# Altium PCB IG-2.PCBDOC (part 1 of 3)
Units mm, origin at the board's own origin, x right, y up, seen from the top; angles counter-clockwise.
Board outline 46.6 x 24.5 mm, 4 copper layers (Top, GND Plane, Mid1-Ver, Bottom), stack 1.565 mm thick; 34 components, 46 nets, 339 pads, 275 vias.
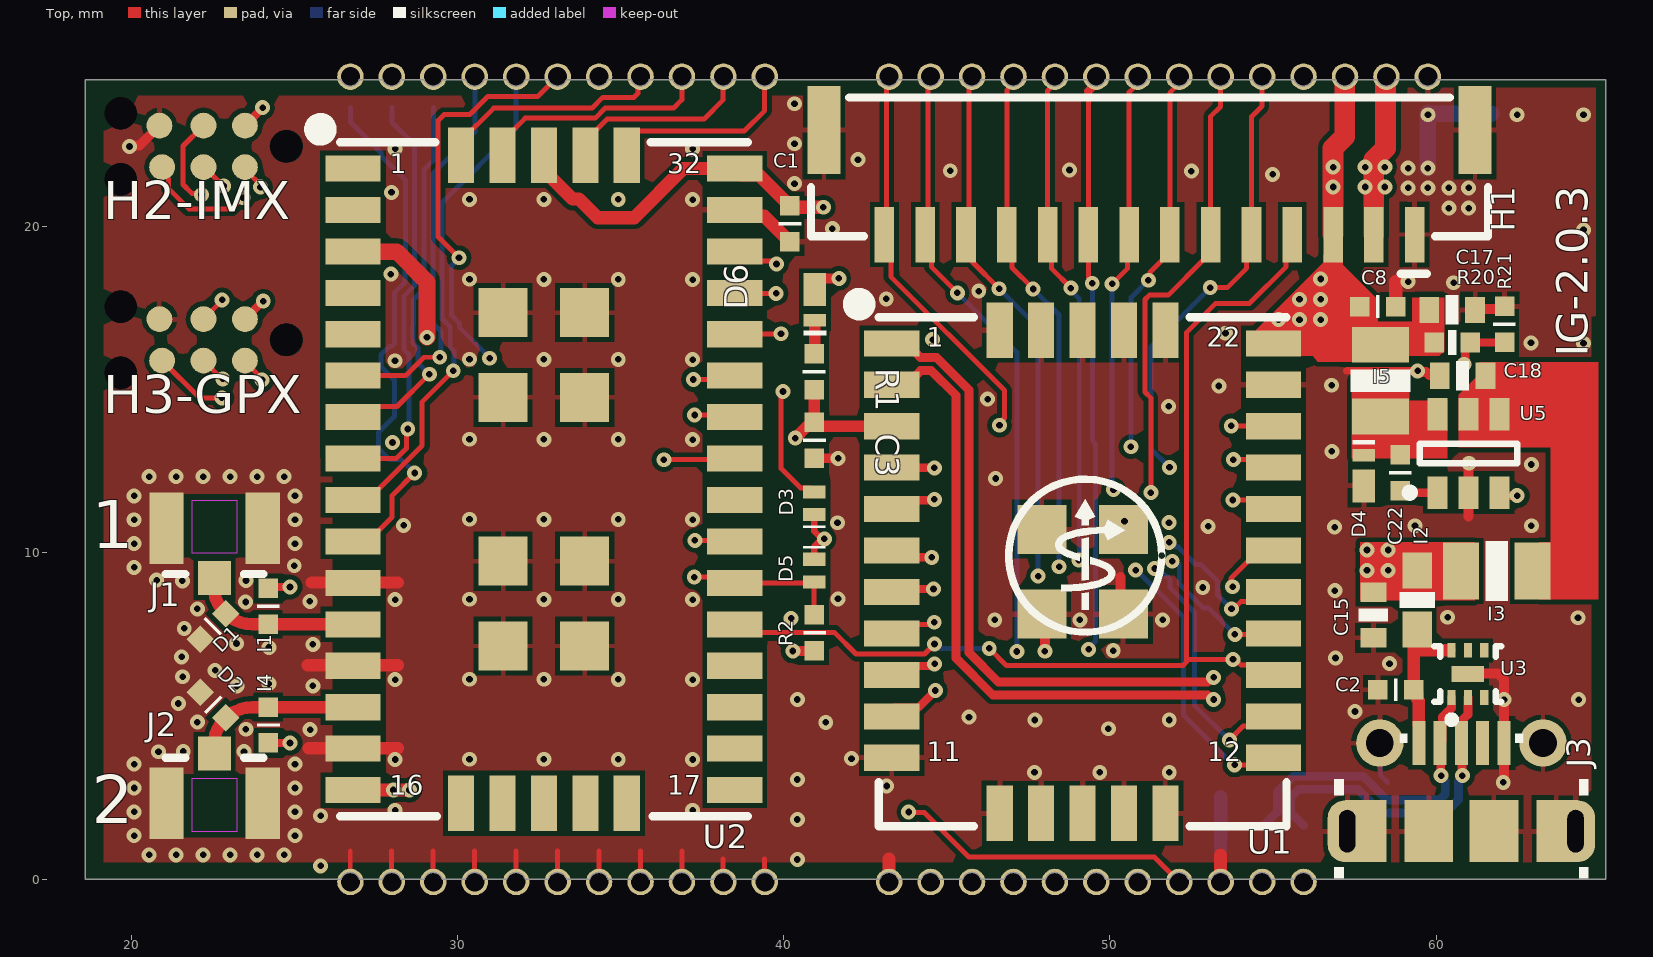
[diagram p0: Top view]
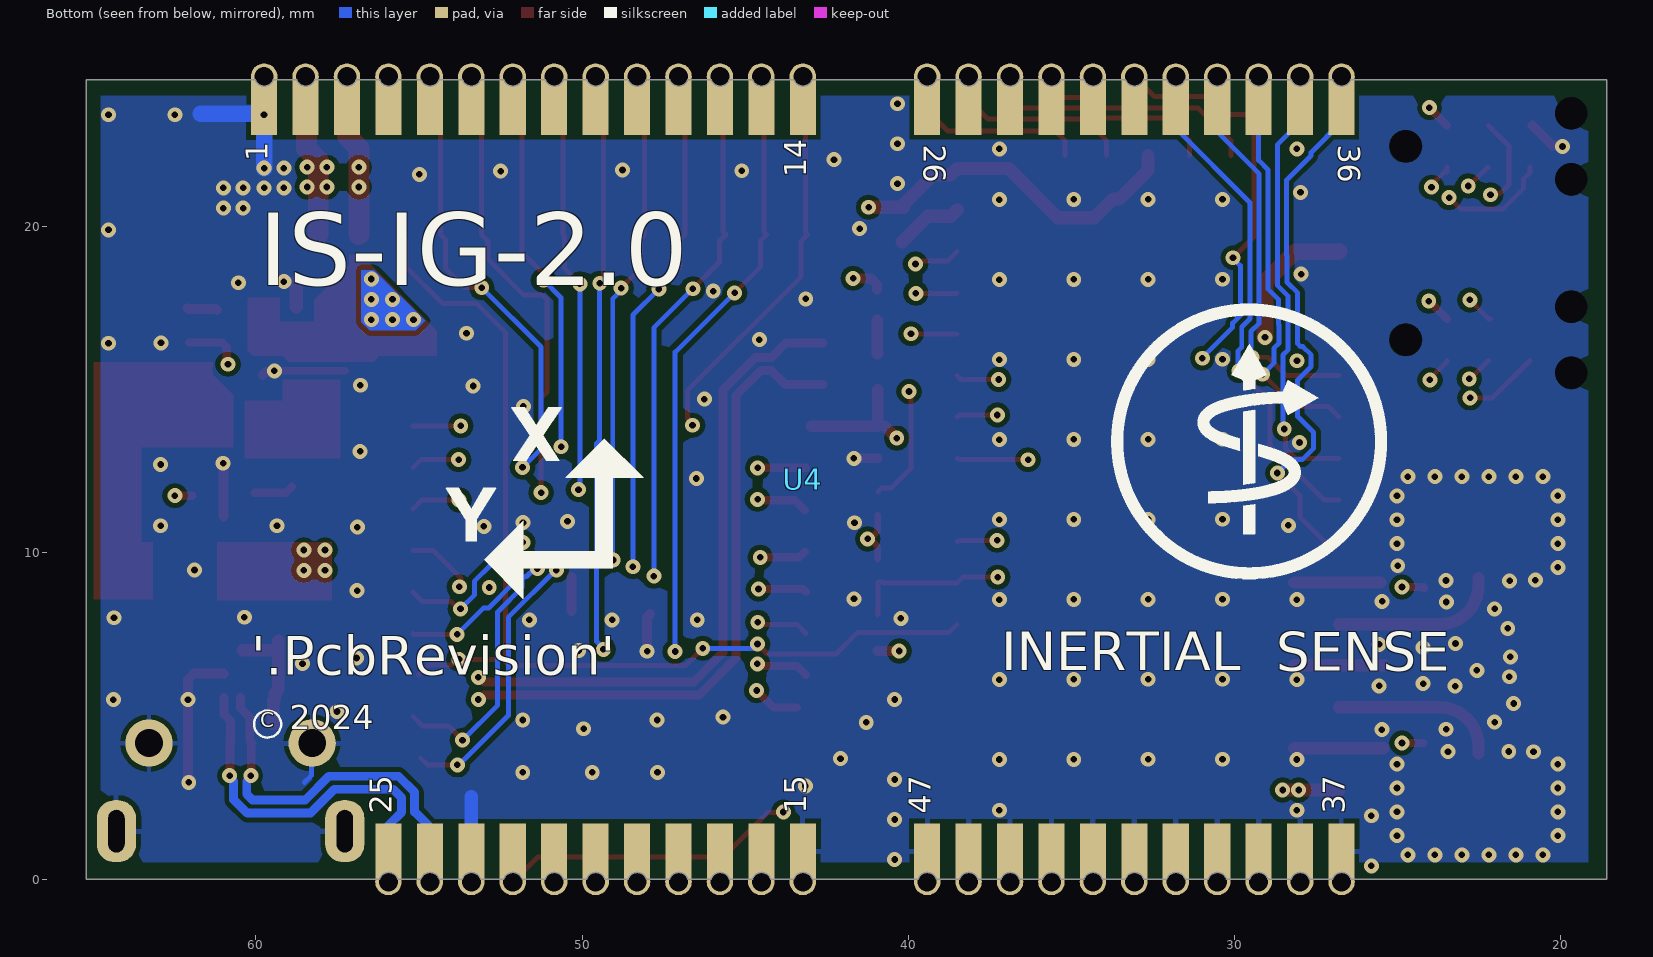
[diagram p1: Bottom view, seen from below]
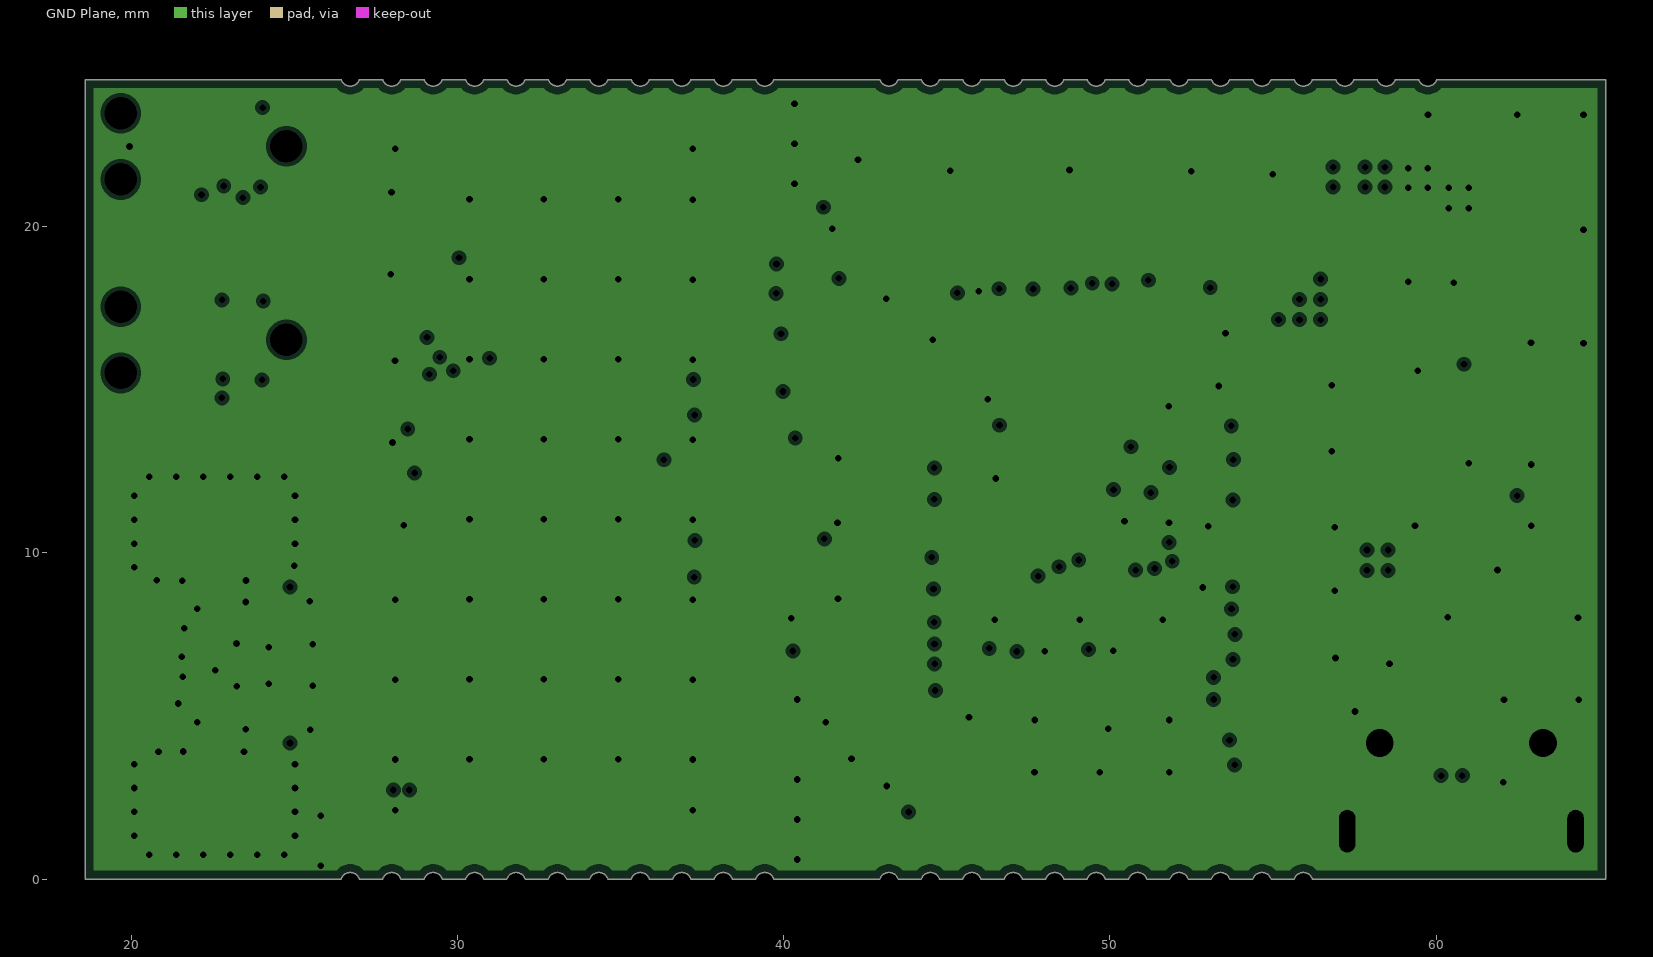
[diagram p2: GND Plane, clearances drawn from the general rule]
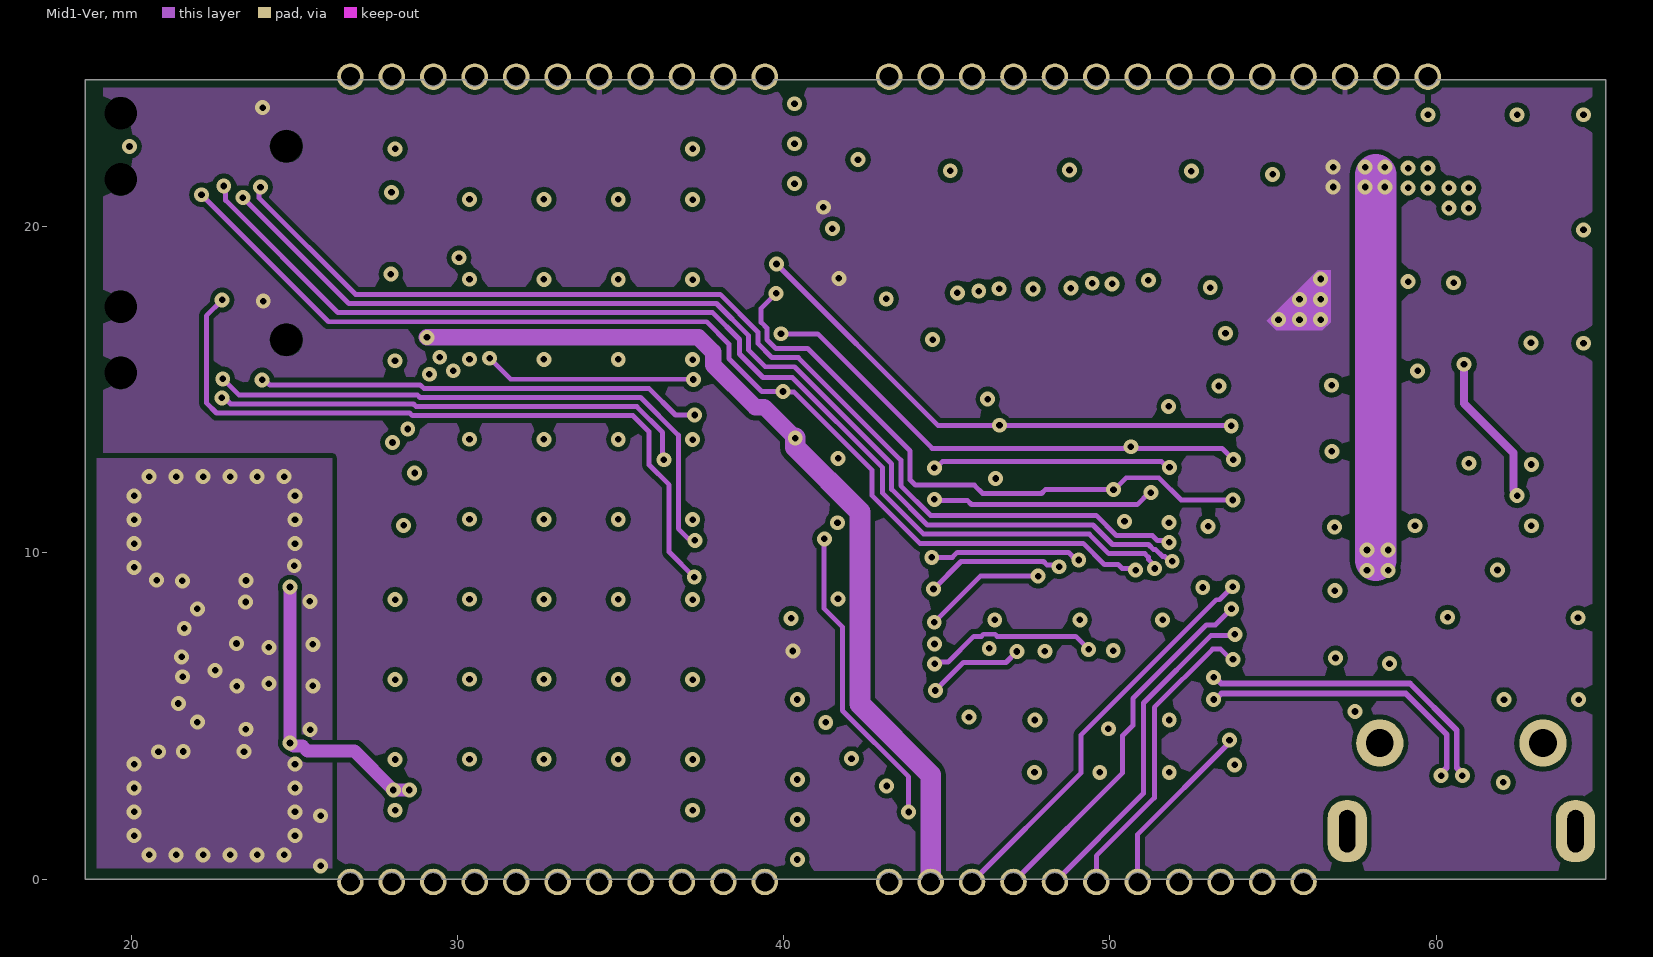
[diagram p3: Mid1-Ver]
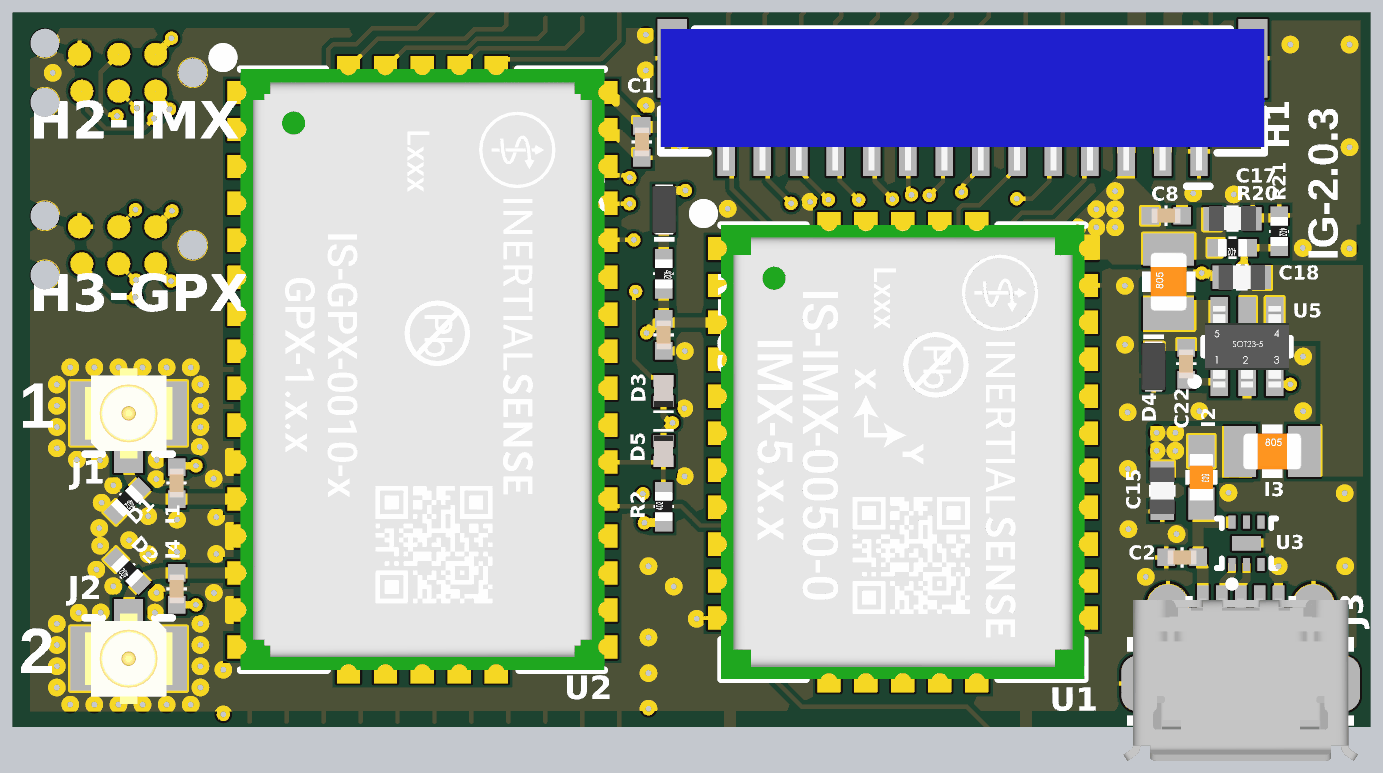
[diagram p5: 3D render of the assembled board from above, using the file's embedded part models]

## Layer stack, top to bottom
Solder Mask Top: solder mask 0.0102, Solder Resist, Dk 3.5
Top: signal copper 0.0533
Dielectric1: prepreg 0.2032, PP-006, Dk 4.1
GND Plane: plane copper 0.0178, net GND
Dielectric3: core 1.016, Core-009, Dk 4.5
Mid1-Ver: signal copper 0.0178
Dielectric2: prepreg 0.2032, PP-006, Dk 4.1
Bottom: signal copper 0.0533
Solder Mask Bottom: solder mask 0.0102, Solder Resist, Dk 3.5

## Board outline
28.265,0 28.979,0 cw(c29.257,-0.09) 29.535,0 30.249,0 cw(c30.527,-0.09) 30.805,0 31.519,0 cw(c31.797,-0.09) 32.075,0 32.789,0 cw(c33.067,-0.09) 33.345,0 34.059,0 cw(c34.337,-0.09) 34.615,0 35.329,0 cw(c35.607,-0.09) 35.885,0 36.599,0 cw(c36.877,-0.09) 37.155,0 37.869,0 cw(c38.147,-0.09) 38.425,0 39.139,0 cw(c39.417,-0.09) 39.695,0 42.949,0 cw(c43.227,-0.09) 43.505,0 44.219,0 cw(c44.497,-0.09) 44.775,0 45.489,0 cw(c45.767,-0.09) 46.045,0 46.759,0 cw(c47.037,-0.09) 47.315,0 48.029,0 cw(c48.307,-0.09) 48.585,0 49.299,0 cw(c49.577,-0.09) 49.855,0 50.569,0 cw(c50.847,-0.09) 51.125,0 51.839,0 cw(c52.117,-0.09) 52.395,0 53.109,0 cw(c53.387,-0.09) 53.665,0 54.379,0 cw(c54.657,-0.09) 54.935,0 55.649,0 cw(c55.927,-0.09) 56.205,0 65.2,0 65.2,24.5 65.194,24.5 60.015,24.5 cw(c59.737,24.59) 59.459,24.5 58.745,24.5 cw(c58.467,24.59) 58.189,24.5 57.475,24.5 cw(c57.197,24.59) 56.919,24.5 56.205,24.5 cw(c55.927,24.59) 55.649,24.5 54.935,24.5 cw(c54.657,24.59) 54.379,24.5 53.665,24.5 cw(c53.387,24.59) 53.109,24.5 52.395,24.5 cw(c52.117,24.59) 51.839,24.5 51.125,24.5 cw(c50.847,24.59) 50.569,24.5 49.855,24.5 cw(c49.577,24.59) 49.299,24.5 48.585,24.5 cw(c48.307,24.59) 48.029,24.5 47.315,24.5 cw(c47.037,24.59) 46.759,24.5 46.045,24.5 cw(c45.767,24.59) 45.489,24.5 44.775,24.5 cw(c44.497,24.59) 44.219,24.5 43.505,24.5 cw(c43.227,24.59) 42.949,24.5 39.695,24.5 cw(c39.417,24.59) 39.139,24.5 38.425,24.5 cw(c38.147,24.59) 37.869,24.5 37.155,24.5 cw(c36.877,24.59) 36.599,24.5 35.885,24.5 cw(c35.607,24.59) 35.329,24.5 34.615,24.5 cw(c34.337,24.59) 34.059,24.5 33.345,24.5 cw(c33.067,24.59) 32.789,24.5 32.075,24.5 cw(c31.797,24.59) 31.519,24.5 30.805,24.5 cw(c30.527,24.59) 30.249,24.5 29.535,24.5 cw(c29.257,24.59) 28.979,24.5 28.265,24.5 cw(c27.987,24.59) 27.709,24.5 26.995,24.5 cw(c26.717,24.59) 26.439,24.5 18.6,24.5 18.6,0 26.439,0 cw(c26.717,-0.09) 26.995,0 27.709,0 cw(c27.987,-0.09)

## Design rules (kind name [scope] priority, off if disabled: settings)
AssemblyTestPointUsage [All] p1 off:
AssemblyTestpoint [All] p1 off: testpointundercomponent=TRUE minsize=1.016 maxsize=2.54 preferedsize=1.524 minholesize=0 maxholesize=1.016 preferedholesize=0.813 testpointgrid=0.025 usegrid=TRUE gridtolerance=0 allowsidetop=TRUE allowsidebottom=TRUE
BoardOutlineClearance BoardOutlineClearance_1 [OnLayer('Silkscreen Top')] p1: gap=0 ignorepadtopadclearanceinfootprint=FALSE
BoardOutlineClearance [All] p2 off: gap=0.25 ignorepadtopadclearanceinfootprint=FALSE
Clearance "Stitching GND" [IsStitchingVia and InNet('GND') vs (IsVia and (Not IsStitchingVia)) Or IsPad] p1: gap=0.05 ignorepadtopadclearanceinfootprint=FALSE
Clearance "Clearance - GPS Ant" [All vs InNet('GPS1_ANT')] p2: gap=0.203 ignorepadtopadclearanceinfootprint=FALSE except(0: Arc-Hole Track-Hole SMDPad-Hole THPad-Hole Via-Hole Fill-Hole Poly-Hole Region-Hole Text-Hole)
Clearance [All] p3: gap=0.127 ignorepadtopadclearanceinfootprint=FALSE except(0: Arc-Hole Track-Hole SMDPad-Hole THPad-Hole Via-Hole Fill-Hole Poly-Hole Region-Hole Text-Hole; 0.15: Arc-Fill Arc-Poly Arc-Region Track-Fill Track-Poly Track-Region SMDPad-Fill SMDPad-Poly SMDPad-Region THPad-Fill THPad-Poly THPad-Region Via-Fill Via-Poly Via-Region Fill-Fill Fill-Poly Fill-Region Poly-Poly Poly-Region Region-Region)
ComponentClearance Ignore [InComponent('H7')] p1: gap=-12.7 collisioncheckmode=3 verticalgap=-12.7 showdistances=FALSE
ComponentClearance HeaderClearance [InComponent('H1')] p2: gap=0.254 collisioncheckmode=3 verticalgap=-0.254 showdistances=FALSE
ComponentClearance Default [All] p3: gap=0.254 collisioncheckmode=3 verticalgap=0.254 showdistances=FALSE
DiffPairsRouting USB [InDifferentialPairClass('USB')] p1: maxlimit=0.127 minlimit=0.127 mostfreqgap=0.127 toplayer_minwidth=0.272 toplayer_maxwidth=0.274 toplayer_prefwidth=0.273 midlayer1_minwidth=0.175 midlayer1_maxwidth=0.178 midlayer1_prefwidth=0.177 bottomlayer_minwidth=0.272 bottomlayer_maxwidth=0.274 bottomlayer_prefwidth=0.273 impedanceprofiledriven=TRUE impedanceprofileid={BBA8E3E2-537E-421E-AE39-E3884618F825} impedanceprofilevalue=90.000000 maxuncoupledlength=12.7
DiffPairsRouting [All] p2: maxlimit=0.203 minlimit=0.203 mostfreqgap=0.203 toplayer_minwidth=0.203 toplayer_maxwidth=0.381 toplayer_prefwidth=0.381 midlayer1_minwidth=0.203 midlayer1_maxwidth=0.381 midlayer1_prefwidth=0.381 bottomlayer_minwidth=0.203 bottomlayer_maxwidth=0.381 bottomlayer_prefwidth=0.381 maxuncoupledlength=12.7
FabricationTestPointUsage [All] p1 off: valid=0 allowmultiple=FALSE
FabricationTestpoint [All] p1 off: side=3 testpointundercomponent=TRUE minsize=1.016 maxsize=2.54 preferedsize=1.524 minholesize=0 maxholesize=1.016 preferedholesize=0.813 testpointgrid=0.025 allowsidetop=TRUE allowsidebottom=TRUE usegrid=TRUE gridtolerance=0
HoleSize [All] p1: absolutevalues=TRUE maxlimit=5.08 minlimit=0.203 maxpercent=80.000 minpercent=20.000
HoleToHoleClearance [All] p1: gap=0.229 allowstackedmicrovias=TRUE
MinimumAnnularRing [All] p1: minimumring=0.114
MinimumSolderMaskSliver [All] p1: minsoldermaskwidth=0.076
PlaneClearance [All] p1: clearance=0.127
PlaneConnect "Power Plane Connect Style" [All] p1: planeconnectstyle=Direct reliefexpansion=0.508 reliefentries=4 reliefconductorwidth=0.178 reliefairgap=0.254
PolygonConnect "No Thermal Polygon Connect" [All vs InNamedPolygon('+1.8_L-01_P-002') or InNamedPolygon('GND_L01_P044') or InPolygonClass('NO THERMALS')] p1: connectstyle=Direct reliefconductorwidth=0.254 reliefentries=4 polygonreliefangle="90 Angle" airgapwidth=0.254
PolygonConnect "Default Polygon Connect" [All] p2: thpad.connectstyle=Relief thpad.reliefconductorwidth=0.15 thpad.reliefentries=4 thpad.polygonreliefangle="90 Angle" thpad.airgapwidth=0.15 smdpad.connectstyle=Relief smdpad.reliefconductorwidth=0.15 smdpad.reliefentries=4 smdpad.polygonreliefangle="90 Angle" smdpad.airgapwidth=0.15 via.connectstyle=Direct via.reliefconductorwidth=0.254 via.reliefentries=4 via.polygonreliefangle="90 Angle" via.airgapwidth=0.254
RoutingCorners "Routing Corners Default" [All] p1: cornerstyle=45-Degree minsetback=2.54 maxsetback=2.54
RoutingLayers "Routing Layers Default" [All] p1: top layer_v5=TRUE mid layer 1_v5=TRUE bottom layer_v5=TRUE
RoutingPriority "Routing Priority Default" [All] p1: routingpriority=0
RoutingVias "Via Style Default" [All] p1: holewidth=0.203 width=0.457 viastyle="Through Hole" minholewidth=0.203 minwidth=0.457 maxholewidth=0.203 maxwidth=0.457
SilkToBoardRegionClearance [All] p1 off:
SilkToSilkClearance [Not ( ((ObjectKind = 'Text') And ((UseInvertedRectangle = 'True') OR (IsTextInverted = 'True'))) OR (ObjectKind = 'Fill') ) vs Not ( ((ObjectKind = 'Text') And ((UseInvertedRectangle = 'True') OR (IsTextInverted = 'True'))) OR (ObjectKind = 'Fill') )] p1: silktosilkclearance=0.025
SilkToSolderMaskClearance SilkscreenOverComponentPads [NOT(IsPad AND OnLayer('Multi-Layer'))] p1: minsilkscreentomaskgap=0 clearancetoexposedcopper=TRUE
SolderMaskExpansion SolderMaskExpansion_Via [IsVia] p1: expansion=-0.5 istentingtop=FALSE
SolderMaskExpansion "Solder Mask Expansion" [All] p2: expansion=0.076 istentingtop=FALSE
SupplyNets "Schematic Supply Nets_3" [InNet('VIN')] p1: voltage=0.000
SupplyNets "Schematic Supply Nets_2" [InNet('GND')] p2: voltage=0.000
SupplyNets "Schematic Supply Nets_1" [InNet('+3.3V')] p3: voltage=0.000
SupplyNets "Schematic Supply Nets" [InNet('VBAT')] p4: voltage=0.000
Width "RF GPS" [InNetClass('RF_GPS')] p1: maxlimit=0.38 minlimit=0.378 preferedwidth=0.378
Width "Width Default" [All] p2: maxlimit=3.81 minlimit=0.076 preferedwidth=0.152
13 further rules are at their usual default settings.

## Classes and differential pairs
differential pair class USB: USB.D
net class RF_GPS: GNSS1_ANT GNSS2_ANT
polygon class "NO THERMALS": RF_GND_L-01_P-001 RF_GND_L-03_P-001
differential pair USB.D: +USB.D_P -USB.D_N

## Components (designator, comment, footprint, x,y, rotation, side; value= is the part's Value field where it differs from the comment)
C1 "Cap" 0402 40.19,20.08 r270 top value=0.1uF
C2 "Cap" 0402 58.757,5.799 r180 top value=100nF
C3 "Cap" 0402 40.942,13.446 r270 top value=2.2uF
C8 "Cap" 0402 58.205,17.541 r0 top value=0.1uF
C15 "Cap" 0603 58.073,8.092 r270 top value=2.2uF
C17 "Cap" 0603 60.488,17.442 r0 top value=22uF
C18 "Cap" 0603 60.809,15.425 r180 top value=2.2uF
C22 "Cap" 0402 58.898,12.452 r90 top value=0.1uF
D1 "Diode - Bidirectional Zener" R0402 22.51,7.74 r225 top
D2 "Diode - Bidirectional Zener" R0402 22.51,5.337 r135 top
D3 "Diode - Schottky" D0402 40.935,11.515 r90 top
D4 "Diode - Schottky" D0603B 57.776,12.359 r270 top
D5 "Diode - Schottky" D0402 40.935,9.45 r270 top
D6 "Diode - Schottky" D0603B 40.958,17.755 r90 top
H1 "Hdr - 14pin - mount" SM14B-GHS-TB(LF)(SN) 51.212,24.301 r180 top locked
H2-IMX "TC2030-IDC" TC2030-IDC-NL 24.76,22.455 r180 top
H3-GPX "TC2030-IDC" TC2030-IDC-NL 24.76,16.525 r180 top
I1 "Inductor" 0402 24.204,8.356 r270 top value=120nH
I2 "Inductor" I0603 59.418,8.552 r270 top value="220 Ohm @ 100MHz"
I3 "Inductor" 0806 61.854,9.441 r0 top value=2.2uH
I4 "Inductor" 0402 24.209,4.72 r90 top value=120nH
I5 "Inductor" 0806 58.296,15.273 r90 top value=2.2uH
J1 "RF - GND x 2" "RF UMC SMD" 22.558,10.75 r270 top locked
J2 "RF - GND x 2" "RF UMC SMD" 22.558,2.321 r90 top locked
J3 "USB-TYPEAB-4GND" "USB Micro AB R/A THR" 60.77,1.467 r0 top locked
R1 "Res" R0402 40.942,15.546 r270 top value=1K
R2 "Res" R0402 40.942,7.547 r90 top value=10K
R20 "Res" R0402 60.488,16.442 r180 top value=30.9K
R21 "Res" R0402 62.094,17.003 r270 top value=10K
U1 "IMX" IS-IMX-5.0 42.911,17.217 r0 top locked
U2 "GPX" IS-GPX-1.0 26.401,22.576 r0 top locked
U3 "VBUS053" QFN50P160X160X60-6N 60.969,6.285 r90 top
U4 "IG 2.0 LGA PADS" IG-2.0_LGA 0,0 r0 top locked
U5 "ADP2301" MO-178-AB 60.988,13.042 r90 top

## Footprints (in the part's own frame and the unit in brackets; to place one, negate y for a bottom-side part, rotate by r counter-clockwise, add the part's x,y. Pads: shape width x height; smd on the part's side, far side on the other; paste and mask are expansions set on the pad)
0402 [mm]
  rect 0.6x0.6 smd: 1(-0.55,0) 2(0.55,0)
  silkscreen extent -0.05,-0.35 0.05,0.35, body extent -0.5,-0.25 0.5,0.25, height 0.51
0603 [mm]
  rect 0.6x0.8 smd: 1(-0.7,0) 2(0.7,0)
  silkscreen extent -0.2,-0.45 0.2,0.45, body extent -0.8,-0.43 0.8,0.43, height 0.87
0806 [mm]
  rect 1.1x1.75 smd: 1(-1.1,0) 2(1.1,0)
  silkscreen extent -0.35,-0.92 0.35,0.92, body extent -1,-0.62 1,0.63, height 0.78
D0402 [mm]
  rect 0.4x0.7 smd: A(0.35,0) C(-0.35,0)
  silkscreen extent -0.76,-0.35 -0.68,0.35, body extent -0.55,-0.33 0.55,0.33, height 0.56
D0603B [mm] "Molded Diode, 2-Leads, Body 1.60x0.80mm, IPC Medium Density"
  rect 1.005x0.69 smd: A(0.312,0)
  rect 0.385x0.69 smd: C(-0.625,0)
  silkscreen extent -1.1,-0.35 -0.95,0.35, body extent -0.86,-0.42 0.86,0.42, height 0.45
I0603 [mm]
  rect 1.1x0.9 smd: 1(-0.9,0) 2(0.9,0)
  silkscreen extent -0.25,-0.55 0.25,0.55, body extent -0.8,-0.4 0.8,0.4, height 0.3
IG-2.0_LGA [mm] "IMX multi-frequency RTK-GNSS Module"
  rect 0.8x1.7 smd far side paste-2.54: 1(59.743,23.65) 2(58.473,23.65) 3(57.203,23.65) 4(55.933,23.65) 5(54.663,23.65) 6(53.393,23.65) 7(52.123,23.65) 8(50.853,23.65) 9(49.583,23.65) 10(48.313,23.65) 11(47.043,23.65) 12(45.773,23.65) 13(44.503,23.65) 14(43.233,23.65) 15(43.233,0.85) 16(44.503,0.85) 17(45.773,0.85) 18(47.043,0.85) 19(48.313,0.85) 20(49.583,0.85) 21(50.853,0.85) 22(52.123,0.85) 23(53.393,0.85) 24(54.663,0.85) 25(55.933,0.85) 26(39.423,23.65) 27(38.153,23.65) 28(36.883,23.65) 29(35.613,23.65) 30(34.343,23.65) 31(33.073,23.65) 32(31.803,23.65) 33(30.533,23.65) 34(29.263,23.65) 35(27.993,23.65) 36(26.723,23.65) 37(26.723,0.85) 38(27.993,0.85) 39(29.263,0.85) 40(30.533,0.85) 41(31.803,0.85) 42(33.073,0.85) 43(34.343,0.85) 44(35.613,0.85) 45(36.883,0.85) 46(38.153,0.85) 47(39.423,0.85)
  rect 0.8x0.4 smd far side paste-2 mask+0.038: 1(59.743,24.25) 2(58.473,24.25) 3(57.203,24.25) 4(55.933,24.25) 5(54.663,24.25) 6(53.393,24.25) 7(52.123,24.25) 8(50.853,24.25) 9(49.583,24.25) 10(48.313,24.25) 11(47.043,24.25) 12(45.773,24.25) 13(44.503,24.25) 14(43.233,24.25) 15(43.233,0.25) 16(44.503,0.25) 17(45.773,0.25) 18(47.043,0.25) 19(48.313,0.25) 20(49.583,0.25) 21(50.853,0.25) 22(52.123,0.25) 23(53.393,0.25) 24(54.663,0.25) 25(55.933,0.25) 26(39.423,24.25) 27(38.153,24.25) 28(36.883,24.25) 29(35.613,24.25) 30(34.343,24.25) 31(33.073,24.25) 32(31.803,24.25) 33(30.533,24.25) 34(29.263,24.25) 35(27.993,24.25) 36(26.723,24.25) 37(26.723,0.25) 38(27.993,0.25) 39(29.263,0.25) 40(30.533,0.25) 41(31.803,0.25) 42(33.073,0.25) 43(34.343,0.25) 44(35.613,0.25) 45(36.883,0.25) 46(38.153,0.25) 47(39.423,0.25)
  round 0.813 hole 0.584 mask-0.051: 1(59.743,24.59) 2(58.473,24.59) 3(57.203,24.59) 4(55.933,24.59) 5(54.663,24.59) 6(53.393,24.59) 7(52.123,24.59) 8(50.853,24.59) 9(49.583,24.59) 10(48.313,24.59) 11(47.043,24.59) 12(45.773,24.59) 13(44.503,24.59) 14(43.233,24.59) 15(43.233,-0.09) 16(44.503,-0.09) 17(45.773,-0.09) 18(47.043,-0.09) 19(48.313,-0.09) 20(49.583,-0.09) 21(50.853,-0.09) 22(52.123,-0.09) 23(53.393,-0.09) 24(54.663,-0.09) 25(55.933,-0.09) 26(39.423,24.59) 27(38.153,24.59) 28(36.883,24.59) 29(35.613,24.59) 30(34.343,24.59) 31(33.073,24.59) 32(31.803,24.59) 33(30.533,24.59) 34(29.263,24.59) 35(27.993,24.59) 36(26.723,24.59) 37(26.723,-0.09) 38(27.993,-0.09) 39(29.263,-0.09) 40(30.533,-0.09) 41(31.803,-0.09) 42(33.073,-0.09) 43(34.343,-0.09) 44(35.613,-0.09) 45(36.883,-0.09) 46(38.153,-0.09) 47(39.423,-0.09)
  body extent 25.33,0.05 60.14,24.45, height 0
IS-GPX-1.0 [mm] "Inerial Sense GPX-1.0, 42pins 1.27mm pitch"
  rect 1.5x1.5 smd: 0(5,-15.435) 0(5,-12.835) 0(5,-7.815) 0(5,-5.215) 0(7.5,-15.435) 0(7.5,-12.835) 0(7.5,-7.815) 0(7.5,-5.215)
  rect 1.7x0.8 smd paste-2.54: 1(0.4,-0.8) 2(0.4,-2.07) 3(0.4,-3.34) 4(0.4,-4.61) 5(0.4,-5.88) 6(0.4,-7.15) 7(0.4,-8.42) 8(0.4,-9.69) 9(0.4,-10.96) 10(0.4,-12.23) 11(0.4,-13.5) 12(0.4,-14.77) 13(0.4,-16.04) 14(0.4,-17.31) 15(0.4,-18.58) 16(0.4,-19.85) 17(12.1,-19.85) 18(12.1,-18.58) 19(12.1,-17.31) 20(12.1,-16.04) 21(12.1,-14.77) 22(12.1,-13.5) 23(12.1,-12.23) 24(12.1,-10.96) 25(12.1,-9.69) 26(12.1,-8.42) 27(12.1,-7.15) 28(12.1,-5.88) 29(12.1,-4.61) 30(12.1,-3.34) 31(12.1,-2.07) 32(12.1,-0.8)
  rect 0.8x1.7 smd paste-2.54: 33(3.71,-20.25) 34(4.98,-20.25) 35(6.25,-20.25) 36(7.52,-20.25) 37(8.79,-20.25) 38(8.79,-0.4) 39(7.52,-0.4) 40(6.25,-0.4) 41(4.98,-0.4) 42(3.71,-0.4)
  silkscreen extent -0.85,-20.65 12.5,0.65, body extent 0,-20.65 12.5,0, height 2.88
IS-IMX-5.0 [mm] "Inerial Sense IMX-5.0, 22pins 1.27mm pitch"
  rect 1.5x1.5 smd: 0(5,-9.1) 0(5,-6.5) 0(7.5,-9.1) 0(7.5,-6.5)
  rect 1.7x0.8 smd paste-2.54: 1(0.4,-0.8) 2(0.4,-2.07) 3(0.4,-3.34) 4(0.4,-4.61) 5(0.4,-5.88) 6(0.4,-7.15) 7(0.4,-8.42) 8(0.4,-9.69) 9(0.4,-10.96) 10(0.4,-12.23) 11(0.4,-13.5) 12(12.1,-13.5) 13(12.1,-12.23) 14(12.1,-10.96) 15(12.1,-9.69) 16(12.1,-8.42) 17(12.1,-7.15) 18(12.1,-5.88) 19(12.1,-4.61) 20(12.1,-3.34) 21(12.1,-2.07) 22(12.1,-0.8)
  rect 0.8x1.7 smd paste-2.54: 23(3.71,-15.2) 23(4.98,-15.2) 23(6.25,-15.2) 23(7.52,-15.2) 23(8.79,-15.2) 24(3.71,-0.4) 24(4.98,-0.4) 24(6.25,-0.4) 24(7.52,-0.4) 24(8.79,-0.4)
  silkscreen extent -0.85,-15.6 12.5,0.65, body extent 0,-15.6 12.5,0, height 2.89
MO-178-AB [mm] "SOT23, 6-Leads, Body 3.0x2.8mm (max), Pitch 0.95mm, IPC Medium Density"
  rect 1x0.6 smd: 1(-1.2,0.95) 2(-1.2,0) 3(-1.2,-0.95) 4(1.2,-0.95) 5(1.2,0) 6(1.2,0.95)
  silkscreen extent -1.32,-1.5 0.3,1.92, body extent -1.4,-1.45 1.41,1.45, height 1.12
QFN50P160X160X60-6N [mm] "QFN, 6-Leads, Body 1.6x1.6mm (max), Pitch 0.50mm, IPC Medium Density"
  rect 0.45x0.25 smd: 1(-0.725,0.5) 2(-0.725,0) 3(-0.725,-0.5) 4(0.725,-0.5) 5(0.725,0) 6(0.725,0.5)
  rect 0.5x1 smd: 7(0,0)
  silkscreen extent -1.5,-1.02 0.85,1.02, body extent -0.82,-0.82 0.82,0.82, height 0.6
R0402 [mm]
  rect 0.6x0.6 smd: 1(-0.55,0) 2(0.55,0)
  silkscreen extent -0.05,-0.36 0.05,0.34, body extent -0.5,-0.3 0.5,0.3, height 0.2
"RF UMC SMD" [mm] "Ultra Miniature Coaxial Surface Mount"
  rect 1.05x1 smd: 1(1.525,0)
  rect 2.2x1.05 smd: 2(0,-1.475) 3(0,1.475)
  Top pour cut-out: -1.05,0.95 -1.05,-0.95 0.9,-0.95 0.9,0.95
  Top keep-out region: -0.85,0.7 -0.85,-0.7 0.75,-0.7 0.75,0.7
  silkscreen extent 1.4,-1.5 1.4,1.5, body extent -1.55,-1.5 1.55,1.5, height 1.3
SM14B-GHS-TB(LF)(SN) [mm] "CONN HEADER GH TOP 15POS 1.25MM"
  rect 1x2.7 smd: 0(-9.975,1.35) 0(9.975,1.35)
  rect 0.6x1.7 smd: 1(-8.125,4.55) 2(-6.875,4.55) 3(-5.625,4.55) 4(-4.375,4.55) 5(-3.125,4.55) 6(-1.875,4.55) 7(-0.625,4.55) 8(0.625,4.55) 9(1.875,4.55) 10(3.125,4.55) 11(4.375,4.55) 12(5.625,4.55) 13(6.875,4.55) 14(8.125,4.55)
  silkscreen extent -10.38,0.35 10.38,5.75, body extent -10.37,0.35 10.37,5.2, height 4.35
TC2030-IDC-NL [mm] "Tag-Connect 6-Pin with No Legs (PN# TC2030-IDC-NL)"
  round 0.9 hole 0.995 unplated: 0(0,0) 0(5.08,-1.016) 0(5.08,1.016)
  round 0.79 smd paste-0.39: 1(1.27,-0.635) 2(1.27,0.635) 3(2.54,-0.635) 4(2.54,0.635) 5(3.89,-0.635) 6(3.81,0.635)
"USB Micro AB R/A THR" [mm] "USB Micro AB R/A Through Hole"
  rect 0.4x1.35 smd: 1(-1.3,2.7) 2(-0.65,2.7) 3(0,2.7) 4(0.65,2.7) 5(1.3,2.7)
  rrect90% 1.2x1.9 hole 0.5 slot 1.3 at 90 deg paste-2539.97 mask+0.076: 6(-3.5,0)
  rect 1.2x1.9 smd: 6(-2.9,0) 7(2.9,0)
  round 1.45 hole 0.85 mask+0.102: 6(-2.5,2.7) 7(2.5,2.7)
  rrect90% 1.2x1.9 hole 0.5 slot 1.3 at 90 deg mask+0.076: 7(3.5,0)
  rect 1.5x1.9 smd: 8(-1,0) 9(1,0)
  silkscreen extent -3.9,-1.45 3.9,3, body extent -4.02,-2.65 4.03,2.92, height 2.69

## Part data
C1 C2 C8: "CAP CER .10UF 50V X7R 10% 0402", Capacitance=0.1µF, Manufacturer="TDK Corporation", Manufacturer Part Number=C1005X7R1H104K, Operating Temperature="-55°C ~ 125°C", Package / Case="0402 (1005 Metric)", Ratings=-, Supplier Part Number 1=445-5932-1-ND, Temperature Coefficient=X7R, Tolerance=±10%, Voltage - Rated=50V, Applications="General Purpose", Category=Capacitors, ComponentLink1Description=http://www.tdk.co.jp/tefe02/e412_c.pdf, ComponentLink1URL=http://www.tdk.co.jp/tefe02/e412_c.pdf, Features=-, Height=-, LatestRevisionDate=17-Jul-2002, LatestRevisionNote="Re-released for DXP Platform.", Lead Spacing=-, Lead Style=-, Mounting Type="Surface Mount, MLCC", Packaging="Cut Tape (CT)", Pricing 1="1=0.3, 10=0.2, 100=0.08, 250=0.05752, 500=0.041, 1000=0.03 (USD)", Published=8-Jun-2000, Publisher="Altium Limited", RoHS="RoHS Compliant", Size / Dimension="0.039\" L x 0.020\" W (1.00mm x 0.50mm)", Stock 1=174080, Supplier 1=Digi-Key, Thickness="0.022\" (0.55mm)"
C3: "0402 2.2 uF 6.3 V ±10% Tolerance X6S Multilayer Ceramic Capacitor", Case Code (Imperial)=0402, Case Code (Metric)=1005, Manufacturer=Murata, Manufacturer Part Number=GRM155C80J225KE95D, Max Operating Temperature=105°C, Min Operating Temperature=-55°C, Supplier Part Number=490-10012-2-ND, Tolerance=10%, Voltage Rating=6.3V, Case/Package=0402, Category=Capacitors, ComponentLink1Description=http://search.murata.co.jp/Ceramy/image/img/A01X/G101/ENG/GRM155C80J225KE95-01.pdf?src-supplier=Digi-Key, ComponentLink1URL=http://search.murata.co.jp/Ceramy/image/img/A01X/G101/ENG/GRM155C80J225KE95-01.pdf?src-supplier=Digi-Key, ComponentLink2Description=http://search.murata.co.jp/Ceramy/image/img/A01X/partnumbering_e_01.pdf?src-supplier=Digi-Key, ComponentLink2URL=http://search.murata.co.jp/Ceramy/image/img/A01X/partnumbering_e_01.pdf?src-supplier=Digi-Key, Height=0.3mm, LatestRevisionDate=17-Jul-2002, LatestRevisionNote="Re-released for DXP Platform.", Length=0.039inch, Material=Ceramic, Mounting Technology="Surface Mount", Packaging="Cut Tape", Pricing="10000=0.01548, 20000=0.01475, 30000=0.01401, 50000=0.01253, 100000=0.01014, 250000=0.00922 (USD)", Published=8-Jun-2000, Publisher="Altium Limited", RoHS=Yes, RoHS Compliant=Yes, Series=GRM, Stock=7200000, Supplier=Digi-Key, Thickness=0.022inch, Voltage Rating (DC)=6.3V, Width=0.02inch
C15 C18: "CAP CER 2.2UF 25V X6S 0603", Capacitance=2.2uF, Case Code (Imperial)=0603, Case Code (Metric)=1608, Dielectric=X6S, Manufacturer=Murata, Manufacturer Part Number=GRT188C81E225KE13D, Max Operating Temperature=105°C, Min Operating Temperature=-55°C, Supplier Part Number 1=490-12293-6-ND, Tolerance=10%, Voltage Rating=25V, Case/Package=0603, Category=Capacitors, ComponentLink1Description=http://www.farnell.com/datasheets/2165949.pdf, ComponentLink1URL=http://www.farnell.com/datasheets/2165949.pdf, ComponentLink2Description=http://search.murata.co.jp/Ceramy/image/img/A01X/G101/ENG/GRT188C81E225KE13-01.pdf, ComponentLink2URL=http://search.murata.co.jp/Ceramy/image/img/A01X/G101/ENG/GRT188C81E225KE13-01.pdf, LatestRevisionDate=17-Jul-2002, LatestRevisionNote="Re-released for DXP Platform.", Length=0.063inch, Mount="Surface Mount", Packaging="Tape and Reel", Pricing 1="1=0.35, 10=0.239, 100=0.1355, 500=0.09564, 1000=0.08369 (USD)", Published=8-Jun-2000, Publisher="Altium Limited", Stock 1=16854, Supplier 1=Digi-Key, Thickness=0.035inch, Voltage Rating (DC)=25V, Width=0.031inch
C17: "CAP CER 22UF 6.3V X6S 0603", Capacitance=22uF, Case Code (Imperial)=0603, Case Code (Metric)=1608, Dielectric=X6S, Manufacturer=Murata, Manufacturer Part Number=GRM188C80J226ME15D, Max Operating Temperature=105°C, Min Operating Temperature=-55°C, Package Quantity=4000, Supplier Part Number 1=490-10471-6-ND, Tolerance=20%, Voltage Rating=6.3V, Case/Package=0603, Category=Capacitors, ComponentLink1Description=http://www.mouser.com/ds/2/281/c02e-2905.pdf, ComponentLink1URL=http://www.mouser.com/ds/2/281/c02e-2905.pdf, ComponentLink2Description=http://search.murata.co.jp/Ceramy/image/img/A01X/partnumbering_e_01.pdf, ComponentLink2URL=http://search.murata.co.jp/Ceramy/image/img/A01X/partnumbering_e_01.pdf, Height=0.8mm, LatestRevisionDate=17-Jul-2002, LatestRevisionNote="Re-released for DXP Platform.", Lead Free="Lead Free", Length=0.063inch, Mount="Surface Mount", Packaging="Tape and Reel", Pricing 1="1=0.25, 10=0.168, 100=0.0955, 500=0.0674, 1000=0.05897 (USD)", Published=8-Jun-2000, Publisher="Altium Limited", Stock 1=0, Supplier 1=Digi-Key, Termination=SMD/SMT, Thickness=0.039inch, Voltage Rating (DC)=6.3V, Weight=0.000222oz, Width=0.8mm
C22: "CAP CER 0.1UF 50V X7R 0402", Capacitance=0.1uF, Case Code (Imperial)=0402, Case Code (Metric)=1005, Dielectric=X7R, Manufacturer=TDK, Manufacturer Part Number=CGA2B3X7R1H104K050BB, Max Operating Temperature=125°C, Min Operating Temperature=-55°C, Package Quantity=1, Ratings=AEC-Q200, Supplier Part Number 1=445-6899-1-ND, Tolerance=10%, Voltage=50V, Case/Package=0402, Category=Capacitors, ComponentLink1Description=https://datasheet.ciiva.com/16498/mlccspec-automotive-general-midvoltage-en-16498528.pdf?src-supplier=Future+Electronics, ComponentLink1URL=https://datasheet.ciiva.com/16498/mlccspec-automotive-general-midvoltage-en-16498528.pdf?src-supplier=Future+Electronics, ComponentLink2Description=https://datasheet.ciiva.com/24216/cga2b3x7r1h104k050bb-266281-24216070.pdf?src-supplier=Mouser, ComponentLink2URL=https://datasheet.ciiva.com/24216/cga2b3x7r1h104k050bb-266281-24216070.pdf?src-supplier=Mouser, ComponentLink3Description=https://datasheet.ciiva.com/7975/1788388-7975306.pdf?src-supplier=Element14, ComponentLink3URL=https://datasheet.ciiva.com/7975/1788388-7975306.pdf?src-supplier=Element14, ComponentLink4Description=https://datasheet.ciiva.com/22703/1807242-22703013.pdf?src-supplier=Element14, ComponentLink4URL=https://datasheet.ciiva.com/22703/1807242-22703013.pdf?src-supplier=Element14, ComponentLink5Description=https://datasheet.ciiva.com/22725/1735392-22725627.pdf?src-supplier=Element14, ComponentLink5URL=https://datasheet.ciiva.com/22725/1735392-22725627.pdf?src-supplier=Element14, Composition=Ceramic, Depth=0.5mm, Height=0.5mm, LatestRevisionDate=17-Jul-2002, LatestRevisionNote="Re-released for DXP Platform.", Lead Free="Lead Free", Length=1mm, Mount="Surface Mount", Packaging="Tape and Reel", Pricing 1="1=0.16000, 10=0.11700, 100=0.05500, 500=0.03858, 1000=0.03194, 2500=0.02973, 5000=0.02720 (USD)", Published=8-Jun-2000, Publisher="Altium Limited", REACH SVHC="No SVHC", RoHS=Yes, Stock 1=12402793, Supplier 1=Digi-Key, Termination=SMD/SMT, Thickness=0.022inch, Voltage Rating=50V, Voltage Rating (DC)=50V, Weight=2.3E-05oz, Width=0.02inch
D1 D2: "LITTELFUSE - PESD0402-140 - DIODE, ESD PROTECTION, 0402, FULL REEL", Case/Package=0402, Clamping Voltage=40V, Manufacturer=Littelfuse, Manufacturer Part Number=PESD0402-140, Max Operating Temperature=125°C, Min Operating Temperature=-55°C, Operating Supply Voltage=14V, Power Line Protection=No, Resistor Type=Zener, Supplier Part Number 1=PESD0402-140CT-ND, Category="TVS Diodes", ComponentLink1Description=https://datasheet.ciiva.com/58684/-58684341.pdf?src-supplier=Digi-Key, ComponentLink1URL=https://datasheet.ciiva.com/58684/-58684341.pdf?src-supplier=Digi-Key, Direction=Bidirectional, Lead Free="Lead Free", Mount="Surface Mount", Number of Bidirectional Channels=1, Number of Pins=2, Packaging="Tape and Reel", Pricing 1="1=0.40000, 10=0.32100, 100=0.22900, 500=0.17400, 1000=0.13737, 2000=0.13279, 5000=0.12821 (USD)", REACH SVHC=Unknown, Reverse Standoff Voltage=14V, RoHS=No, Stock 1=211482, Supplier 1=Digi-Key, Turn-On Delay Time=1ns, Working Voltage=14V
D3 D5: "CDBQR0130L; SMT Schottky Diode; 35V 100mA; 2-Pin SOD-923F (0402)", Average Rectified Current=100mA, Case Code (Imperial)=0402, Case Code (Metric)=1005, Manufacturer=Comchip, Manufacturer Part Number=CDBQR0130L, Max Reverse Leakage Current=10uA, Max Reverse Voltage (DC)=30V, Max Surge Current=1A, Package Quantity=1, Supplier Part Number=641-1271-2-ND, Case/Package=0402, Category="Rectifier Diodes", Mounting Technology="Surface Mount", Packaging="Tape and Reel", Pricing="5000=0.05980, 10000=0.05083, 25000=0.04784, 50000=0.04485, 125000=0.03887 (USD)", RoHS=Yes, RoHS Compliant=Yes, Stock=645000, Supplier=Digi-Key
  D3: ComponentLink1Description=https://datasheet.ciiva.com/913/cdbqr0130l-revb795355-913009.pdf?src-supplier=Digi-Key, ComponentLink1URL=https://datasheet.ciiva.com/913/cdbqr0130l-revb795355-913009.pdf?src-supplier=Digi-Key, ComponentLink2Description=https://datasheet.ciiva.com/4716/cdbqr0130l-revb795355-33189-4716003.pdf?src-supplier=Mouser, ComponentLink2URL=https://datasheet.ciiva.com/4716/cdbqr0130l-revb795355-33189-4716003.pdf?src-supplier=Mouser, ComponentLink3Description=https://datasheet.ciiva.com/913/cdbqr0130l-revb795355-913010.pdf?src-supplier=Digi-Key, ComponentLink3URL=https://datasheet.ciiva.com/913/cdbqr0130l-revb795355-913010.pdf?src-supplier=Digi-Key, ComponentLink4Description=https://datasheet.ciiva.com/913/cdbqr0130l-revb795355-913011.pdf?src-supplier=Digi-Key, ComponentLink4URL=https://datasheet.ciiva.com/913/cdbqr0130l-revb795355-913011.pdf?src-supplier=Digi-Key
  D5: ComponentLink1Description=https://datasheet.ciiva.com/8301/bas70lp-8301585.pdf?src-supplier=Avnet, ComponentLink1URL=https://datasheet.ciiva.com/8301/bas70lp-8301585.pdf?src-supplier=Avnet, ComponentLink2Description=https://datasheet.ciiva.com/26949/getdatasheetpartid-661958-26949407.pdf?src-supplier=Verical, ComponentLink2URL=https://datasheet.ciiva.com/26949/getdatasheetpartid-661958-26949407.pdf?src-supplier=Verical, ComponentLink3Description=https://datasheet.ciiva.com/18567/bas70lp-18567705.pdf?src-supplier=Digi-Key, ComponentLink3URL=https://datasheet.ciiva.com/18567/bas70lp-18567705.pdf?src-supplier=Digi-Key, ComponentLink4Description=https://datasheet.ciiva.com/16418/bas70lp-16418375.pdf?src-supplier=Future+Electronics, ComponentLink4URL=https://datasheet.ciiva.com/16418/bas70lp-16418375.pdf?src-supplier=Future+Electronics, ComponentLink5Description=https://datasheet.ciiva.com/913/cdbqr0130l-revb795355-913009.pdf?src-supplier=Digi-Key, ComponentLink5URL=https://datasheet.ciiva.com/913/cdbqr0130l-revb795355-913009.pdf?src-supplier=Digi-Key, ComponentLink6Description=https://datasheet.ciiva.com/4716/cdbqr0130l-revb795355-33189-4716003.pdf?src-supplier=Mouser, ComponentLink6URL=https://datasheet.ciiva.com/4716/cdbqr0130l-revb795355-33189-4716003.pdf?src-supplier=Mouser, ComponentLink7Description=https://datasheet.ciiva.com/913/cdbqr0130l-revb795355-913010.pdf?src-supplier=Digi-Key, ComponentLink7URL=https://datasheet.ciiva.com/913/cdbqr0130l-revb795355-913010.pdf?src-supplier=Digi-Key, ComponentLink8Description=https://datasheet.ciiva.com/913/cdbqr0130l-revb795355-913011.pdf?src-supplier=Digi-Key, ComponentLink8URL=https://datasheet.ciiva.com/913/cdbqr0130l-revb795355-913011.pdf?src-supplier=Digi-Key
D4 D6: "DIODE SCHOTTKY 30V 2A 0603", Manufacturer=Vishay, Manufacturer Part Number=VSKY20301608-G4-08, Supplier Part Number 1=VSKY20301608-G4-08GICT-ND, ComponentLink1Description=http://www.mouser.com/ds/2/427/vsky20301608-777242.pdf, ComponentLink1URL=http://www.mouser.com/ds/2/427/vsky20301608-777242.pdf, Pricing 1="1=0.38, 10=0.305, 25=0.2792, 100=0.2076, 250=0.1882, 500=0.15574, 1000=0.1168, 2500=0.10707 (USD)", Stock 1=13064, Supplier 1=Digi-Key
H1: "Conn Shrouded Header HDR 14 POS 1.25mm Solder ST Top Entry SMD T/R", Manufacturer=JST, Manufacturer Part Number=SM14B-GHS-TB(LF)(SN), Supplier Part Number 1=455-1576-2-ND, Category=Connectors, Pricing 1="2500=0.35044, 5000=0.33876, 12500=0.31072, 25000=0.30371 (USD)", RoHS=No, Supplier 1=Digi-Key
H2-IMX H3-GPX: "6 pin header"
I1 I4: "Inductor RF Chip Wirewound 120nH 5% 100MHz 20Q-Factor 110mA 2.66Ohm DCR 0402 Paper T/R", Case Code (Imperial)=0402, Case Code (Metric)=1005, Current Rating=110mA, DC Resistance (DCR)=2.66R, Inductance=120nH, Inductance Tolerance=5%, Manufacturer=Murata, Manufacturer Part Number=LQW15ANR12J00D, Max Operating Temperature=125°C, Min Operating Temperature=-55°C, Package Quantity=10000, Self Resonant Frequency=1GHz, Supplier Part Number 1=490-4091-1-ND, Test Frequency=100MHz, Case/Package=0402, Category="Fixed Inductors", ComponentLink1Description=http://search.murata.co.jp/Ceramy/image/img/PDF/ENG/L0075S0083LQG15HS.pdf, ComponentLink1URL=http://search.murata.co.jp/Ceramy/image/img/PDF/ENG/L0075S0083LQG15HS.pdf, ComponentLink2Description=https://datasheet.ciiva.com/11799/0900766b8090d800-11799096.pdf?src-supplier=RSComponents, ComponentLink2URL=https://datasheet.ciiva.com/11799/0900766b8090d800-11799096.pdf?src-supplier=RSComponents, ComponentLink3Description=https://datasheet.ciiva.com/1042/l0075s0080lqw15a-00-1042180.pdf?src-supplier=Digi-Key, ComponentLink3URL=https://datasheet.ciiva.com/1042/l0075s0080lqw15a-00-1042180.pdf?src-supplier=Digi-Key, ComponentLink4Description=https://datasheet.ciiva.com/1042/l0075s0080lqw15a-00-1042181.pdf?src-supplier=Digi-Key, ComponentLink4URL=https://datasheet.ciiva.com/1042/l0075s0080lqw15a-00-1042181.pdf?src-supplier=Digi-Key, ComponentLink5Description=https://datasheet.ciiva.com/1042/l0075s0080lqw15a-00-1042182.pdf?src-supplier=Digi-Key, ComponentLink5URL=https://datasheet.ciiva.com/1042/l0075s0080lqw15a-00-1042182.pdf?src-supplier=Digi-Key, ComponentLink6Description=https://datasheet.ciiva.com/16207/l0075s0080lqw15a-00-16207819.pdf?src-supplier=Future+Electronics, ComponentLink6URL=https://datasheet.ciiva.com/16207/l0075s0080lqw15a-00-16207819.pdf?src-supplier=Future+Electronics, ComponentLink7Description=https://datasheet.ciiva.com/8506/l0075s0080lqw15a-00-8506030.pdf?src-supplier=Avnet, ComponentLink7URL=https://datasheet.ciiva.com/8506/l0075s0080lqw15a-00-8506030.pdf?src-supplier=Avnet, Core Material=Air,Ferrite, DC Current=110mA, Depth=0.6mm, Height=0.5mm, Lead Free="Lead Free", Length=1mm, Max DC Current=110mA, Military Standard=Not, Mount="Surface Mount", Number of Pins=2, Packaging="Tape and Reel", Pricing 1="1=0.15000, 10=0.13500, 25=0.12000, 50=0.10200, 100=0.09000, 250=0.08252, 500=0.07500, 1000=0.06300, 2500=0.05400 (USD)", Radiation Hardening=No, REACH SVHC="No SVHC", RoHS=Yes, Shielding=Unshielded, Stock 1=2053, Supplier 1=Digi-Key, Termination=SMD/SMT, Tolerance=5%, Weight=2.8E-05oz, Width=0.02inch
I2: "FERRITE CHIP 220 OHM 2500MA 0603", Current Rating=2.5A, DC Resistance (DCR)="40 mOhm Max", Impedance @ Frequency="220 Ohm @ 100MHz", Manufacturer="Murata Electronics North America", Manufacturer Part Number=BLM18SG221TN1D, Package / Case="0603 (1608 Metric)", Supplier Part Number 1=490-5225-1-ND, Category=Filters, ComponentLink1Description=http://search.murata.co.jp/Ceramy/image/img/PDF/ENG/L0110S0100BLM18S.pdf, ComponentLink1URL=http://search.murata.co.jp/Ceramy/image/img/PDF/ENG/L0110S0100BLM18S.pdf, Filter Type="Differential Mode - Single", Height (Max)="0.037\" (0.95mm)", Mounting Type="Surface Mount", Packaging="Cut Tape (CT)", Pricing 1="1=0.14, 10=0.116, 50=0.075, 100=0.0646, 250=0.05172, 500=0.04654, 1000=0.03878, 5000=0.03619 (USD)", RoHS="RoHS Compliant", Size / Dimension="0.063\" L x 0.031\" W (1.60mm x 0.80mm)", Stock 1=146728, Supplier 1=Digi-Key
I3 I5: "FIXED IND 2.2UH 1.2A 110 MOHM", Case Code (Imperial)=0806, Case Code (Metric)=2016, Current Rating=1.2A, DC Resistance (DCR)=137.5mR, Inductance=2.2uh, Manufacturer=TDK, Manufacturer Part Number=MLP2016H2R2MT0S1, Max Operating Temperature=125°C, Min Operating Temperature=-40°C, Package Quantity=3000, Supplier Part Number 1=445-15724-6-ND, Test Frequency=2MHz, Tolerance=20%, Case/Package=0806, ComponentLink1Description=https://datasheet.ciiva.com/29697/inductor-commercial-power-mlp-en-29697725.pdf, ComponentLink1URL=https://datasheet.ciiva.com/29697/inductor-commercial-power-mlp-en-29697725.pdf, ComponentLink2Description=https://datasheet.ciiva.com/29697/inductor-commercial-power-mlp-en-29697726.pdf, ComponentLink2URL=https://datasheet.ciiva.com/29697/inductor-commercial-power-mlp-en-29697726.pdf, Core Material=Ferrite, Height - Seated (Max)=0.039inch, Lead Free="Lead Free", Length=0.079inch, Mount="Surface Mount", Packaging="Tape and Reel", Pricing 1="1=0.38, 10=0.335, 100=0.2302, 500=0.19674, 1000=0.1507 (USD)", Shielding=Unshielded, Stock 1=14048, Supplier 1=Digi-Key, Width=0.063inch
J1 J2: "CONN UMC RCPT STR 50 OHM SMD", Dielectric Material=-, Frequency - Max=6GHz, Housing Color=Gold, Manufacturer="Emerson Network Power Connectivity Johnson", Manufacturer Part Number=128-0711-201, Operating Temperature="-40°C ~ 90°C", Supplier Part Number 1=J983CT-ND, Voltage Rating=200V, Body Finish=Gold, Body Material=-, Cable Group=-, Category="Connectors, Interconnects", Center Contact Material=-, Center Contact Plating=Gold, ComponentLink1Description=http://media.digikey.com/pdf/Data%20Sheets/Emerson%20PDFs/UMC%20Product%20Catalog.pdf, ComponentLink1URL=http://media.digikey.com/pdf/Data%20Sheets/Emerson%20PDFs/UMC%20Product%20Catalog.pdf, Connector Style="Ultra Miniature Coaxial", Connector Type="Receptacle, Male Pins", Contact Termination=Solder, Fastening Type=Snap-On, Features=-, Impedance="50 Ohm", Ingress Protection=-, Mounting Type="Surface Mount", Packaging="Cut Tape (CT)", Pricing 1="1=0.93, 10=0.832, 50=0.784, 100=0.672, 250=0.576, 500=0.544, 750=0.48, 1000=0.448 (USD)", RoHS="RoHS Compliant", Shield Termination=Solder, Stock 1=1514, Supplier 1=Digi-Key
J3: "CONN USB AB 4POS", Colour=Black, Current Rating=1.8A, Flammability Rating="UL94 V-0", Insulation Resistance=1GR, Manufacturer="Amphenol FCI", Manufacturer Part Number=10118194-0001LF, Max Operating Temperature=85°C, Max Voltage Rating (AC)=100V, Min Operating Temperature=-55°C, Package Quantity=9600, Supplier Part Number 1=609-4618-1-ND, ComponentLink1Description=https://datasheet.ciiva.com/851/10118194-851110.pdf, ComponentLink1URL=https://datasheet.ciiva.com/851/10118194-851110.pdf, ComponentLink2Description=https://datasheet.ciiva.com/851/10118194-851111.pdf, ComponentLink2URL=https://datasheet.ciiva.com/851/10118194-851111.pdf, ComponentLink3Description=https://datasheet.ciiva.com/4598/10118194ac-197217-4598807.pdf, ComponentLink3URL=https://datasheet.ciiva.com/4598/10118194ac-197217-4598807.pdf, ComponentLink4Description=https://datasheet.ciiva.com/29907/10118194-29907230.pdf, ComponentLink4URL=https://datasheet.ciiva.com/29907/10118194-29907230.pdf, ComponentLink5Description=https://datasheet.ciiva.com/26945/getdatasheetpartid-418619-26945695.pdf, ComponentLink5URL=https://datasheet.ciiva.com/26945/getdatasheetpartid-418619-26945695.pdf, Connector Type=USB,Receptacle, Contact Material="Copper Alloy", Contact Plating=Gold, Depth=5mm, Features=Shielded, Gender=Receptacle, Housing Material=Polymer, Lead Free="Lead Free", Length=8.05mm, Mount="Surface Mount,Horizontal", Number of Contacts=5, Number of Ports=1, Number of Terminals=5, Orientation="Right Angle", Packaging="Tape and Reel", Pitch=0.65mm, Pricing 1="1=0.48, 10=0.447, 25=0.402, 50=0.3574, 100=0.3424, 250=0.31264, 500=0.29776 (USD)", Radiation Hardening=No, Stock 1=77572, Supplier 1=Digi-Key, Termination=Solder
R1: "1 kOhms ¡À1% 0.063W, 1/16W Chip Resistor 0402 (1005 Metric) Moisture Resistant Thick Film", Case Code (Imperial)=0402, Case Code (Metric)=1005, Manufacturer=Yageo, Manufacturer Part Number=RC0402FR-071KL, Max Operating Temperature=155°C, Max Power Dissipation=63mW, Min Operating Temperature=-55°C, Power Rating=62.5mW, Resistance Tolerance=1%, Resistor Type="Thick Film", Supplier Part Number=311-1.00KLRTR-ND, Temperature Coefficient=100ppm/°C, Voltage Rating=50V, Case/Package=0402, Category="Chip SMD Resistors", ComponentLink1Description=https://datasheet.ciiva.com/11819/0900766b80c66297-11819477.pdf?src-supplier=Rs, ComponentLink1URL=https://datasheet.ciiva.com/11819/0900766b80c66297-11819477.pdf?src-supplier=Rs, ComponentLink2Description=https://datasheet.ciiva.com/7983/1018594-7983502.pdf?src-supplier=Element14, ComponentLink2URL=https://datasheet.ciiva.com/7983/1018594-7983502.pdf?src-supplier=Element14, ComponentLink3Description=https://datasheet.ciiva.com/22747/1018594-22747513.pdf?src-supplier=Element14, ComponentLink3URL=https://datasheet.ciiva.com/22747/1018594-22747513.pdf?src-supplier=Element14, ComponentLink4Description=https://datasheet.ciiva.com/12666/pyu-rc0402-51-rohs-l-6-r-12666741.pdf?src-supplier=Mouser, ComponentLink4URL=https://datasheet.ciiva.com/12666/pyu-rc0402-51-rohs-l-6-r-12666741.pdf?src-supplier=Mouser, ComponentLink5Description=https://datasheet.ciiva.com/7849/1018594-7849869.pdf?src-supplier=Element14, ComponentLink5URL=https://datasheet.ciiva.com/7849/1018594-7849869.pdf?src-supplier=Element14, ComponentLink6Description=https://datasheet.ciiva.com/7849/1018594-7849871.pdf?src-supplier=Element14, ComponentLink6URL=https://datasheet.ciiva.com/7849/1018594-7849871.pdf?src-supplier=Element14, ComponentLink7Description=https://datasheet.ciiva.com/17063/pyu-rc0402-51-rohs-l-6-r-17063193.pdf?src-supplier=Future+Electronics, ComponentLink7URL=https://datasheet.ciiva.com/17063/pyu-rc0402-51-rohs-l-6-r-17063193.pdf?src-supplier=Future+Electronics, Construction=Rectangular, Depth=0.5mm, Features="Moisture Resistant", Height=0.32mm, Lead Free="Lead Free", Length=1mm, Military Standard=Not, Number of Terminations=2, Packaging="Tape and Reel", Pins=2, Pricing="10000=0.00261, 20000=0.00231, 30000=0.00216, 50000=0.00199, 100000=0.00179 (USD)", Reach SVHC Compliant=No, RoHS=Yes, RoHS Compliant=Yes, Series=RC, Stock=29757748, Supplier=Digi-Key, Technology="THICK FILM", Termination=SMD/SMT, Tolerance=1%, Voltage Rating (DC)=50V, Width=0.5mm
R2: "10 kOhms 1% 0.063W, 1/16W Chip Resistor 0402 (1005 Metric) Moisture Resistant Thick Film", Case Code (Imperial)=0402, Case Code (Metric)=1005, Manufacturer="Stackpole Electronics", Manufacturer Part Number=RMCF0402FT10K0, Max Operating Temperature=155°C, Max Power Dissipation=63mW, Min Operating Temperature=-55°C, Power Rating=62.5mW, Resistance Tolerance=1%, Resistor Type="Thick Film", Supplier Part Number=RMCF0402FT10K0TR-ND, Temperature Coefficient=100ppm/°C, Voltage Rating=50V, Case/Package=0402, Category="Chip SMD Resistors", ComponentLink1Description=https://datasheet.ciiva.com/11819/0900766b80c66297-11819477.pdf?src-supplier=Rs, ComponentLink1URL=https://datasheet.ciiva.com/11819/0900766b80c66297-11819477.pdf?src-supplier=Rs, ComponentLink2Description=https://datasheet.ciiva.com/7983/1018594-7983502.pdf?src-supplier=Element14, ComponentLink2URL=https://datasheet.ciiva.com/7983/1018594-7983502.pdf?src-supplier=Element14, ComponentLink3Description=https://datasheet.ciiva.com/22747/1018594-22747513.pdf?src-supplier=Element14, ComponentLink3URL=https://datasheet.ciiva.com/22747/1018594-22747513.pdf?src-supplier=Element14, ComponentLink4Description=https://datasheet.ciiva.com/12666/pyu-rc0402-51-rohs-l-6-r-12666741.pdf?src-supplier=Mouser, ComponentLink4URL=https://datasheet.ciiva.com/12666/pyu-rc0402-51-rohs-l-6-r-12666741.pdf?src-supplier=Mouser, ComponentLink5Description=https://datasheet.ciiva.com/7849/1018594-7849869.pdf?src-supplier=Element14, ComponentLink5URL=https://datasheet.ciiva.com/7849/1018594-7849869.pdf?src-supplier=Element14, ComponentLink6Description=https://datasheet.ciiva.com/7849/1018594-7849871.pdf?src-supplier=Element14, ComponentLink6URL=https://datasheet.ciiva.com/7849/1018594-7849871.pdf?src-supplier=Element14, ComponentLink7Description=https://datasheet.ciiva.com/17063/pyu-rc0402-51-rohs-l-6-r-17063193.pdf?src-supplier=Future+Electronics, ComponentLink7URL=https://datasheet.ciiva.com/17063/pyu-rc0402-51-rohs-l-6-r-17063193.pdf?src-supplier=Future+Electronics, Construction=Rectangular, Depth=0.5mm, Features="Moisture Resistant", Height=0.32mm, Lead Free="Lead Free", Length=1mm, Military Standard=Not, Number of Terminations=2, Packaging="Tape and Reel", Pins=2, Pricing="10000=0.00261, 20000=0.00231, 30000=0.00216, 50000=0.00199, 100000=0.00179 (USD)", Reach SVHC Compliant=No, RoHS=Yes, RoHS Compliant=Yes, Series=RC, Stock=29757748, Supplier=Digi-Key, Technology="THICK FILM", Termination=SMD/SMT, Tolerance=1%, Voltage Rating (DC)=50V, Width=0.5mm
R20: "RES TF 30.9K OHM 1% 1/16W 0402", Manufacturer="Stackpole Electronics Inc", Manufacturer Part Number=RMCF0402FT30K9, Package / Case="0402 (1005 Metric)", Power (Watts)="0.063W, 1/16W", Resistance (Ohms)=30.9K, Supplier Part Number 1=RMCF0402FT30K9CT-ND, Temperature Coefficient=±100ppm/°C, Tolerance=±1%, Category=Resistors, ComponentLink1Description=http://www.seielect.com/Catalog/SEI-RMCF.pdf, ComponentLink1URL=http://www.seielect.com/Catalog/SEI-RMCF.pdf, Composition="Thick Film", Features=-, Height="0.016\" (0.40mm)", LatestRevisionDate=2-Dec-2009, Number of Terminations=2, Packaging="Cut Tape (CT)", Pricing 1="1=0.04, 10=0.025, 50=0.0138, 100=0.0105, 250=0.0078, 500=0.00576, 1000=0.00384 (USD)", RoHS="RoHS Compliant", Size / Dimension="0.039\" L x 0.020\" W (1.00mm x 0.50mm)", Stock 1=6328, Supplier 1=Digi-Key
R21: "RES 10.0K OHM 1/16W 1% 0402 SMD", Manufacturer=Yageo, Manufacturer Part Number=RC0402FR-0710KL, Package / Case="0402 (1005 Metric)", Power (Watts)="0.063W, 1/16W", Resistance (Ohms)=10K, Supplier Part Number 1=311-10.0KLRCT-ND, Temperature Coefficient=±100ppm/°C, Tolerance=±1%, Category=Resistors, ComponentLink1Description=http://www.yageo.com/documents/recent/PYu-RC0402_51_RoHS_L_6.pdf, ComponentLink1URL=http://www.yageo.com/documents/recent/PYu-RC0402_51_RoHS_L_6.pdf, Composition="Thick Film", Features=-, Height="0.014\" (0.35mm)", LatestRevisionDate=2-Dec-2009, Number of Terminations=2, Packaging="Cut Tape (CT)", Pricing 1="10=0.014, 50=0.0104, 100=0.0079, 250=0.00584, 500=0.00432, 1000=0.00288 (USD)", RoHS="RoHS Compliant", Size / Dimension="0.039\" L x 0.020\" W (1.00mm x 0.50mm)", Stock 1=5597980, Supplier 1=Digi-Key
U1: library part IS-IMX-5.0, "Inertial Sense IMX", Manufacturer="Inertial Sense", Manufacturer Part Number=IS-IMX-5, Supplier 1="Inertial Sense", Supplier Part Number 1=IS-IMX-5
U2: library part IS-GPX-1.0, "Inertial Sense GPX", Manufacturer="Inertial Sense", Manufacturer Part Number=IS-GPX-1, Supplier 1="Inertial Sense", Supplier Part Number 1=IS-GPX-1
U3: "ESD SUPPRESS 5.5V 36W 3-Line USB", Breakdown Voltage="6.5 V", Capacitance="0.7 pF", Clamping Voltage="18 V", Manufacturer="Vishay Semiconductors", Manufacturer Part Number=VBUS053AZ-HAF-GS08, Operating Temperature Range="- 40 C to + 125 C", Operating Voltage="5.5 V (Min)", Package / Case=LLP-75, Supplier Part Number 1=78-VBUS053AZ-HAF, Category="ESD Suppressors", ComponentLink1Description=http://www.vishay.com/docs/81845/vbus053a.pdf, ComponentLink1URL=http://www.vishay.com/docs/81845/vbus053a.pdf, Minimum Order Quantity=1, Packaging=Reel, Pricing 1="1=1.04, 10=0.918, 50=0.805, 100=0.689, 500=0.574, 1000=0.446, 3000=0.366, 9000=0.335 (AUD)", Product Category="Transient Voltage Suppressors", Reeling=True, RoHS="RoHS Compliant", RoHS - Mouser=Y, Series=VBUS053AZ-HAF, Stock 1=8176, Supplier 1=Mouser
U4: library part IG_2.0_LGA, "IMX multi-frequency RTK-GNSS Module"
U5: "IC BUCK ADJ 1.2A 6TSOT", Current - Output=1.2A, Frequency - Switching=1.4MHz, Manufacturer="Analog Devices Inc", Manufacturer Part Number=ADP2301AUJZ-R7, Operating Temperature="-40°C ~ 125°C", Package / Case="SOT-23-6 Thin, TSOT-23-6", Supplier Device Package=TSOT-6, Supplier Part Number 1=ADP2301AUJZ-R7CT-ND, Voltage - Input="3 V ~ 20 V", Voltage - Output="0.8 V ~ 17 V", Category="Integrated Circuits (ICs)", ComponentLink1Description=http://www.analog.com/static/imported-files/data_sheets/ADP2300_2301.pdf, ComponentLink1URL=http://www.analog.com/static/imported-files/data_sheets/ADP2300_2301.pdf, Mounting Type="Surface Mount", Number of Outputs=1, Output Type=Adjustable, Packaging="Cut Tape (CT)", Pricing 1="1=3.06, 25=2.4992, 100=2.244, 250=2.04, 500=1.785, 1000=1.53 (USD)", PWM Type="Current Mode", RoHS="RoHS Compliant", Stock 1=6699, Supplier 1=Digi-Key, Synchronous Rectifier=No, Type="Step-Down (Buck)"

## Via types
v1: diameter 0.457, hole 0.203, Top to Bottom, 275 vias

## Nets (pads, with @x,y where several pads share a name; then routed paths per layer and width w, separated by ;. In a path a pad name is that pad's centre, name@x,y a point inside that pad or via, vN(x,y) a via of type N, cw(c..) or ccw(c..) an arc to the next point about the centre after c; other vN are vias at no path point)
+3.3V: C1.1 C8.1 C17.1 D6.A H1.3 H2-IMX.1 H3-GPX.1 I5.2 R2.1 R20.2 U1.22 U2.32 U2.40 U4.3 U4.30 | length 18.9
  Top w0.254: H3-GPX.1@23.49,17.16 24.04,17.71 v1(24.05,17.71) ; H2-IMX.1@23.49,23.09 24.03,23.63 v1(24.03,23.64)
  Top w0.305: v1(40.28,6.99) 40.284,6.994 40.938,6.994 R2.1@40.942,6.997 ; D6.A@40.958,18.067 40.958,18.217 41.15,18.41 v1(41.69,18.41)
  Top w0.406: U2.40@32.651,22.176 32.651,21.726 33.537,20.84 33.73,20.84 34.3,20.27 35.42,20.27 36.926,21.776 U2.32@38.501,21.776 38.698,21.579 39.241,21.579 C1.1@40.19,20.63 ; C1.1@40.136,20.588 C1.1@40.476,20.588 ; C1.1@40.472,20.581 40.476,20.585 41.213,20.585 v1(41.217,20.588)
  Top w0.635: H1.3@56.837,19.751 56.837,22.395 57.198,22.755 U4.3@57.198,24.539
  other v1: 55.163,17.143 55.809,17.143 56.454,17.143 55.809,17.765 56.454,17.765 56.454,18.388 56.837,21.209 56.837,21.816
FB: R20.1 R21.2 U5.3 | length 7
  Top w0.254: v1@60.844,15.771 60.844,15.826 60.889,15.871 60.889,16.294 R20.1@61.038,16.442 R21.2@62.038,16.442 ; U5.3@61.946,11.749 v1(62.476,11.749)
  Mid1-Ver w0.254: v1(60.848,15.775) 60.848,14.576 62.364,13.06 62.364,11.916 62.476,11.804 v1(62.476,11.749)
G1/Rx2/RxCAN/SCL: H1.5 U1.4 U4.5 | length 22.7
  Top w0.152: v1@51.809,12.634 v1(51.825,12.617) ; v1(53.073,18.125) 53.592,18.125 54.19,18.723 54.19,19.604 H1.5@54.337,19.751 54.337,23.362 54.658,23.683 54.658,24.199 U4.5@54.658,24.539
  Top w0.254: U1.4@43.136,12.607 43.141,12.602 v1(44.616,12.602)
  Mid1-Ver w0.152: v1(44.616,12.602) 44.672,12.602 44.862,12.791 51.582,12.791 51.757,12.617 v1(51.825,12.617)
  Bottom w0.152: v1(51.825,12.617) 51.254,13.189 51.254,16.305 v1(53.073,18.125)
G2/Tx2TxCAN/SDA/STRB: H1.6 U1.5 U4.6 | length 22.5
  Top w0.152: v1(51.254,11.84) 51.254,14.745 51.072,14.926 51.072,17.761 51.206,17.895 51.781,17.895 52.888,19.003 52.888,19.553 H1.6@53.087,19.751 53.087,23.372 53.388,23.673 53.388,24.199 U4.6@53.388,24.539
  Top w0.254: U1.5@43.172,11.301 43.481,11.61 44.592,11.61 v1(44.62,11.637)
  Mid1-Ver w0.152: v1(44.62,11.637) 44.652,11.605 45.627,11.605 45.754,11.478 49.736,11.478 49.739,11.475 50.832,11.475 51.198,11.84 v1(51.254,11.84)
G5/SCLK/STRBE: H1.9 U1.9 U4.9 | length 24.7
  Top w0.152: 49.337,24.147 H1.9@49.337,19.751 49.339,19.749 49.339,18.444 49.458,18.326 v1(49.458,18.257) ; v1@49.342,7.043 v1(49.347,7.038)
  Top w0.254: U1.9@43.136,6.257 43.409,6.53 44.505,6.53 44.57,6.594 v1(44.625,6.594) ; 49.337,24.147 49.578,24.388 U4.9@49.578,24.539
  Mid1-Ver w0.152: v1(44.625,6.594) 44.683,6.652 45.043,6.652 45.829,7.438 46.058,7.438 46.121,7.502 46.479,7.502 46.542,7.438 48.947,7.438 v1(49.347,7.038)
  Bottom w0.152: v1@49.347,7.048 49.347,7.077 49.554,7.284 49.554,13.342 49.458,13.438 v1(49.458,18.257)
G6/Rx1/MOSI: H1.10 U1.6 U4.10 | length 21.4
  Top w0.152: U4.10@48.308,24.539 48.308,24.374 48.087,24.153 H1.10@48.087,19.751 48.202,19.636 48.202,18.715 v1@48.803,18.114
  Top w0.254: U1.6@43.176,10.027 43.345,9.857 v1(44.539,9.857)
  Mid1-Ver w0.152: v1(44.539,9.857) 45.167,9.857 45.32,10.01 48.728,10.01 48.961,9.777 v1(49.043,9.777)